# Altium PCB logic_board.PcbDoc
Units mil, origin at the board's own origin, x right, y up, seen from the top; angles counter-clockwise.
Board outline 3937.01 x 3937.01 mil, 2 copper layers (Top Layer, Bottom Layer); 81 components, 66 nets, 283 pads, 36 vias.
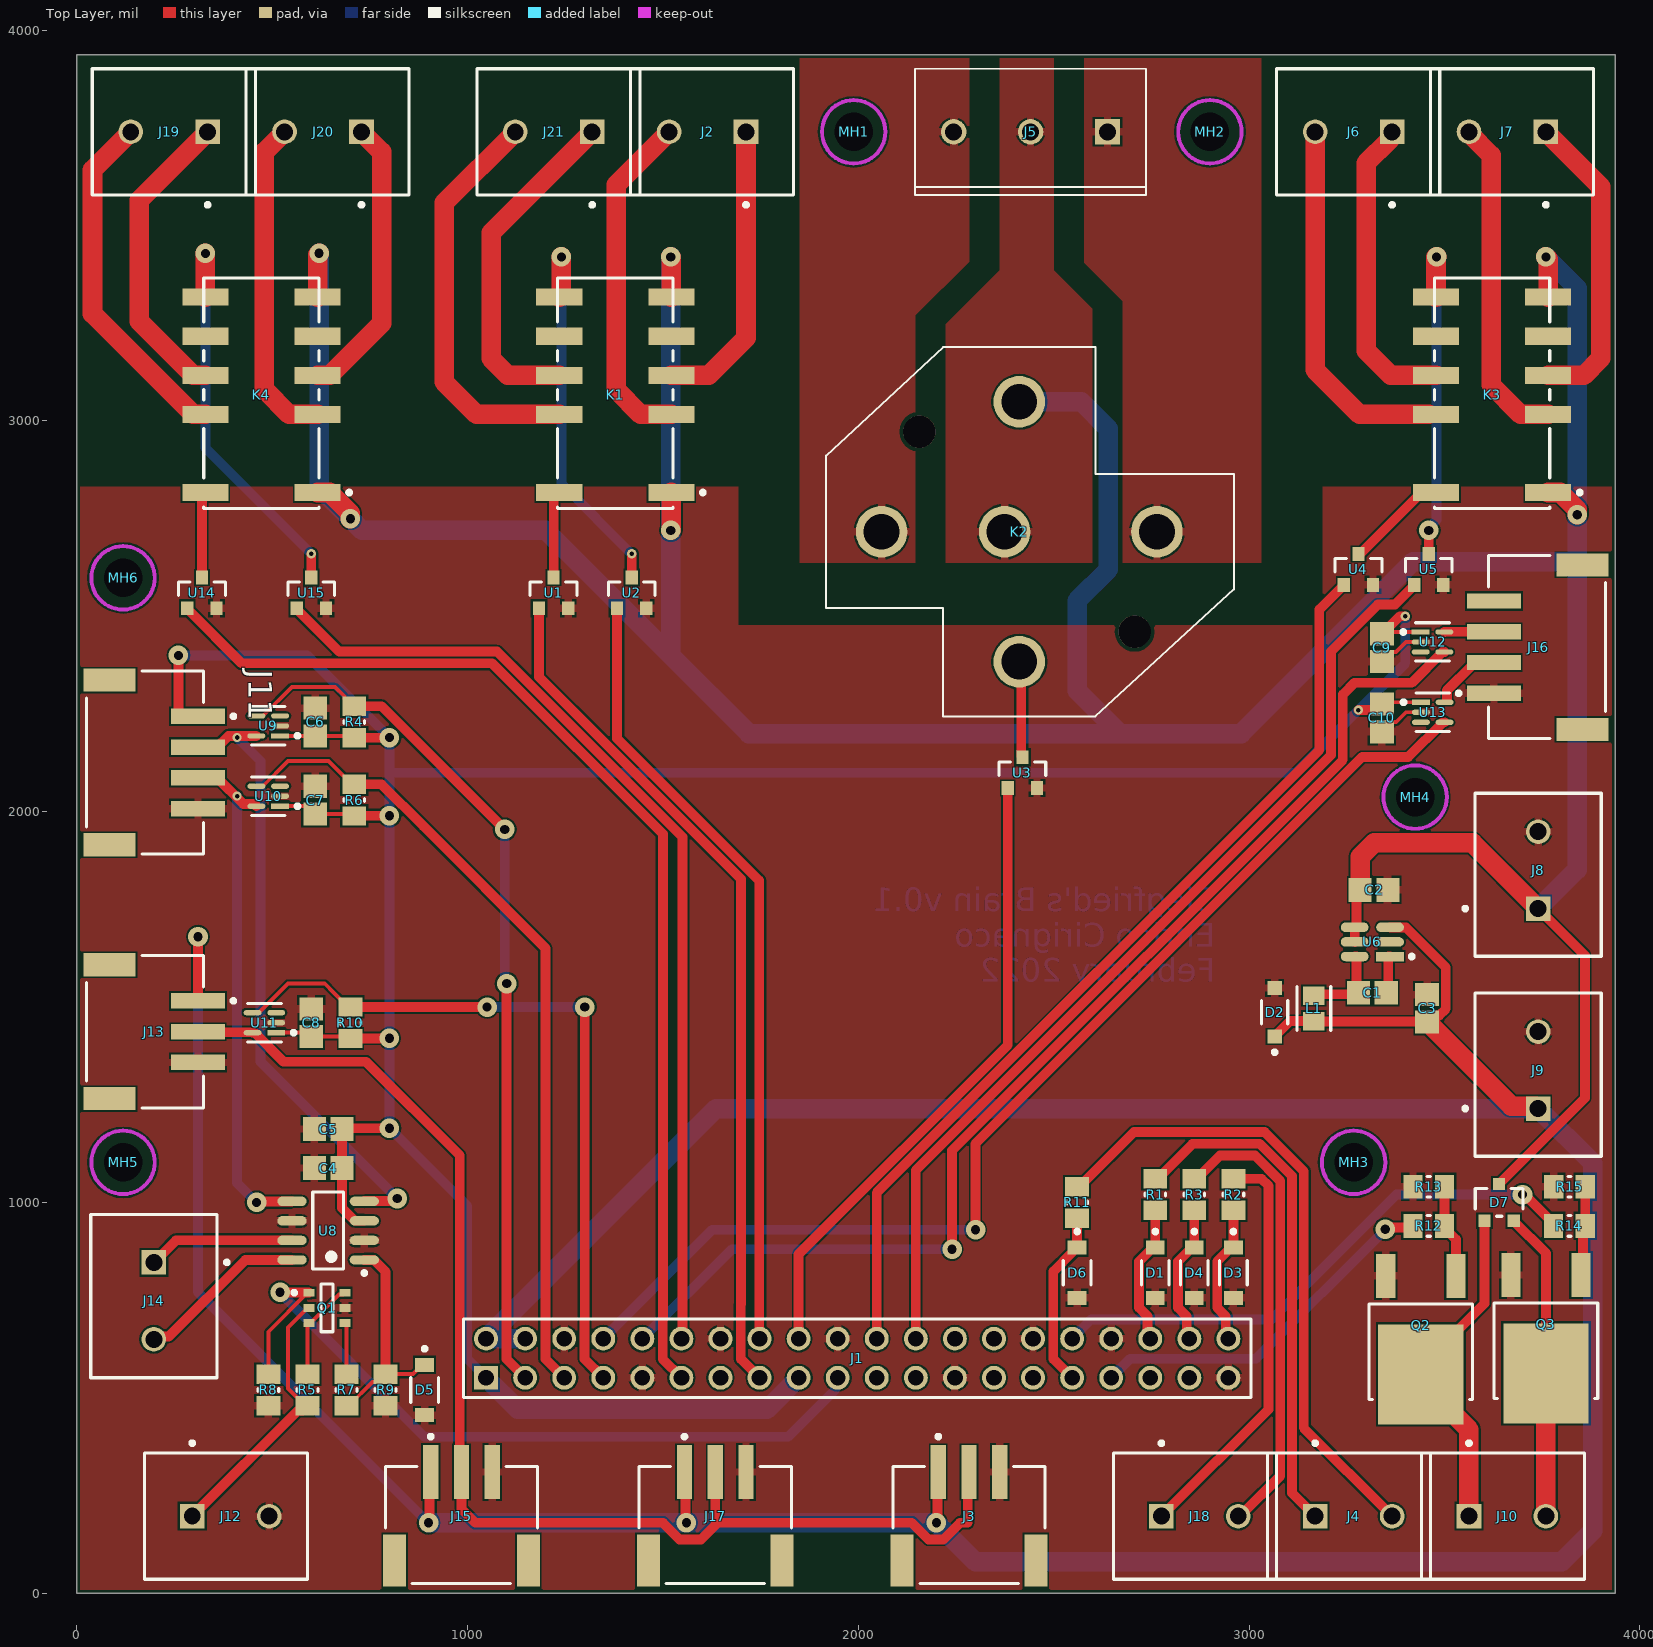
[diagram p0: Top Layer view]
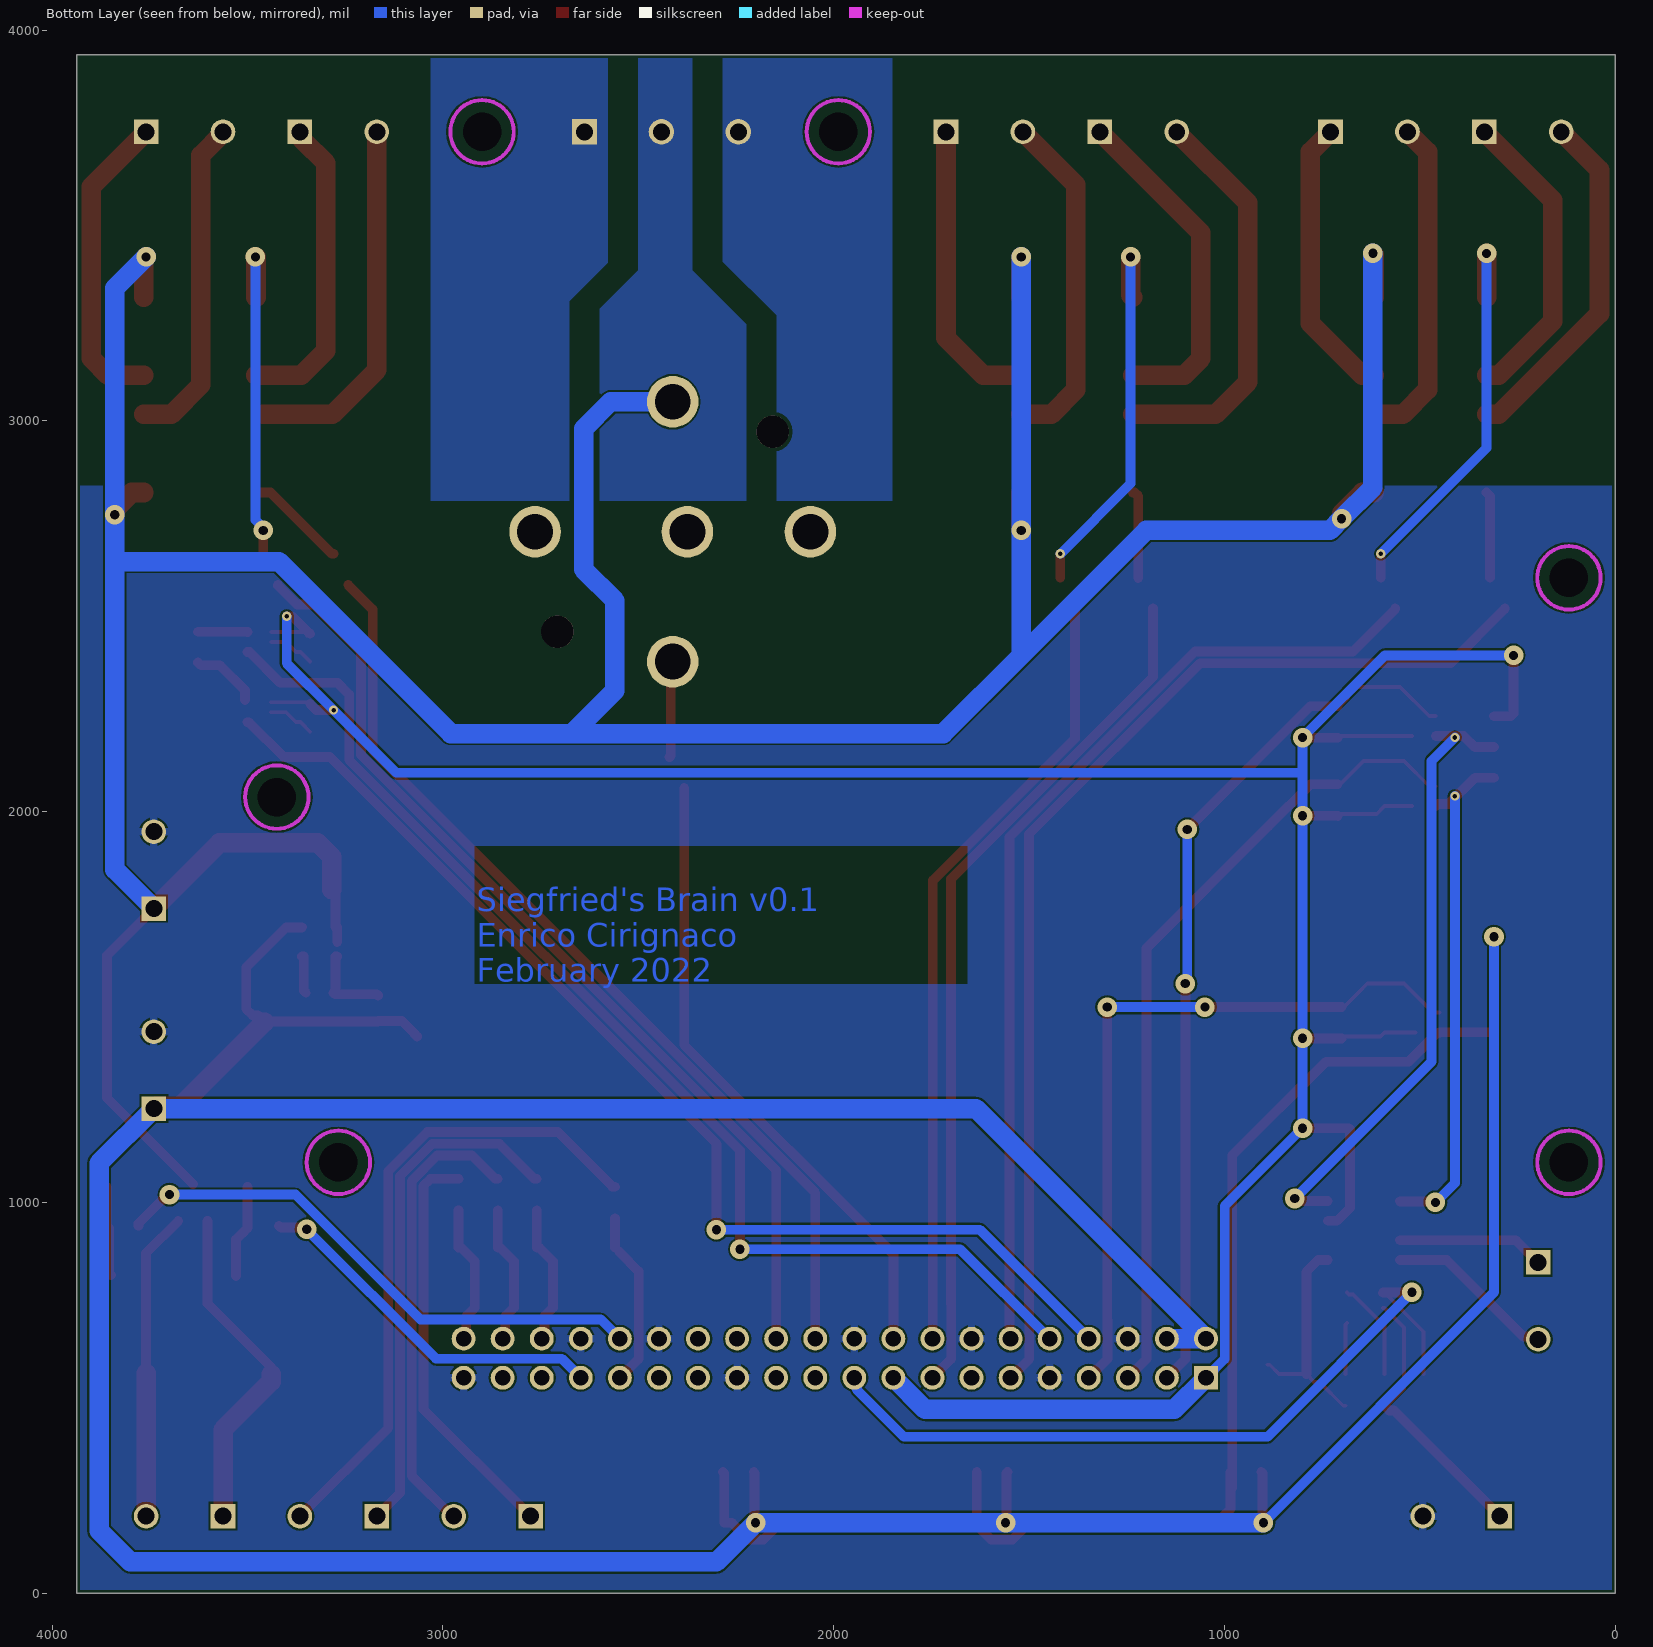
[diagram p1: Bottom Layer view, seen from below]
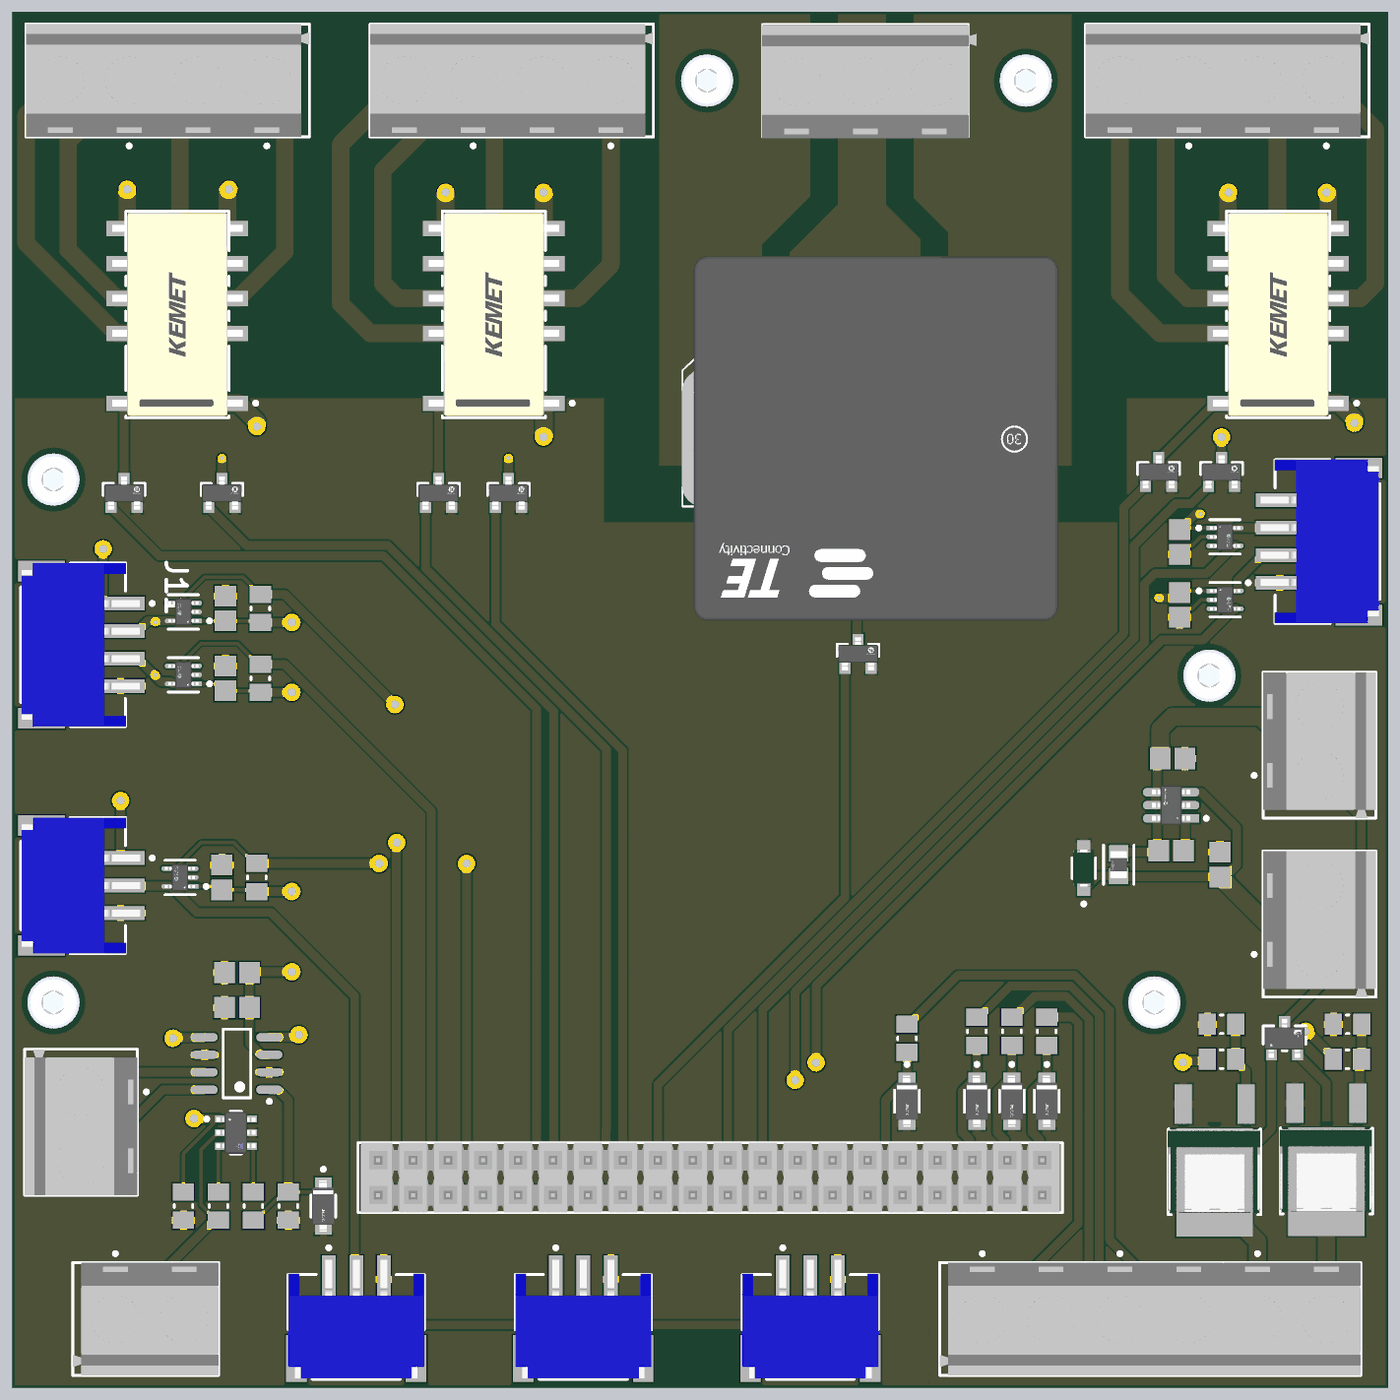
[diagram p2: 3D render of the assembled board from above, using the file's embedded part models]

## Layer stack, top to bottom
Top Solder: solder mask 0.4, Solder Resist, Dk 3.5
Top Layer: signal copper 1.4
Dielectric 1: dielectric 12.6, FR-4, Dk 4.8
Bottom Layer: signal copper 1.4
Bottom Solder: solder mask 0.4, Solder Resist, Dk 3.5

## Board outline
0,0 0,3937.01 3937.01,3937.01 3937.01,0

## Design rules (kind name [scope] priority, off if disabled: settings)
BoardOutlineClearance [All] p1: gap=7.87 ignorepadtopadclearanceinfootprint=FALSE
Clearance high_voltage [All] p1 off: gap=118.11 ignorepadtopadclearanceinfootprint=FALSE
Clearance [All] p2: gap=5 ignorepadtopadclearanceinfootprint=FALSE except(9.84: Arc-Hole Track-Hole SMDPad-Hole THPad-Hole Via-Hole Fill-Hole Poly-Hole Region-Hole Text-Hole)
ComponentClearance [All] p1: gap=5 collisioncheckmode=3 verticalgap=5 showdistances=TRUE
DiffPairsRouting [All] p1: maxlimit=10 minlimit=5 mostfreqgap=5 toplayer_minwidth=5 toplayer_maxwidth=1000 toplayer_prefwidth=5 bottomlayer_minwidth=5 bottomlayer_maxwidth=1000 bottomlayer_prefwidth=5 maxuncoupledlength=500
Height [All] p1: minheight=0 maxheight=71497.94 prefheight=500
HoleSize [All] p1: absolutevalues=TRUE maxlimit=248.03 minlimit=11.81 maxpercent=80.000 minpercent=20.000
HoleToHoleClearance [All] p1: gap=9.84 allowstackedmicrovias=FALSE
MinimumAnnularRing [All] p1: minimumring=3
MinimumSolderMaskSliver [All] p1: minsoldermaskwidth=0
PlaneClearance [All] p1: clearance=5
PlaneConnect PlaneConnectPowerPads [InPadClass('PowerPads')] p1: planeconnectstyle=Direct reliefexpansion=20 reliefentries=4 reliefconductorwidth=10 reliefairgap=10
PlaneConnect [All] p2: pad.planeconnectstyle=Relief pad.reliefexpansion=11.81 pad.reliefentries=4 pad.reliefconductorwidth=5 pad.reliefairgap=5 via.planeconnectstyle=Direct via.reliefexpansion=11.81 via.reliefentries=4 via.reliefconductorwidth=5 via.reliefairgap=5
PolygonConnect PolygonConnect_2 [All vs IsNamedPolygon('NETJ5_1_L02_P006') Or IsNamedPolygon('NETJ5_2_L02_P005') Or IsNamedPolygon('NETJ5_3_L02_P004')] p1: thpad.connectstyle=Direct thpad.reliefconductorwidth=10 thpad.reliefentries=4 thpad.polygonreliefangle="90 Angle" thpad.airgapwidth=10 smdpad.connectstyle=Relief smdpad.reliefconductorwidth=10 smdpad.reliefentries=4 smdpad.polygonreliefangle="90 Angle" smdpad.airgapwidth=10 via.connectstyle=Relief via.reliefconductorwidth=10 via.reliefentries=4 via.polygonreliefangle="90 Angle" via.airgapwidth=10
PolygonConnect PolygonConnect_1 [All vs IsNamedPolygon('NETJ5_1_L02_P006') Or IsNamedPolygon('NETJ5_2_L02_P005') Or IsNamedPolygon('NETJ5_3_L02_P004')] p2: thpad.connectstyle=Direct thpad.reliefconductorwidth=10 thpad.reliefentries=4 thpad.polygonreliefangle="90 Angle" thpad.airgapwidth=10 smdpad.connectstyle=Relief smdpad.reliefconductorwidth=10 smdpad.reliefentries=4 smdpad.polygonreliefangle="90 Angle" smdpad.airgapwidth=10 via.connectstyle=Relief via.reliefconductorwidth=10 via.reliefentries=4 via.polygonreliefangle="90 Angle" via.airgapwidth=10
PolygonConnect PolygonConnectPowerPads [All vs (InPadClass('PowerPads'))] p3: connectstyle=Direct reliefconductorwidth=10 reliefentries=4 polygonreliefangle="90 Angle" airgapwidth=10
PolygonConnect [All] p4: thpad.connectstyle=Relief thpad.reliefconductorwidth=20 thpad.reliefentries=4 thpad.polygonreliefangle="90 Angle" thpad.airgapwidth=5 smdpad.connectstyle=Relief smdpad.reliefconductorwidth=20 smdpad.reliefentries=4 smdpad.polygonreliefangle="90 Angle" smdpad.airgapwidth=5 via.connectstyle=Direct via.reliefconductorwidth=5 via.reliefentries=4 via.polygonreliefangle="90 Angle" via.airgapwidth=5
RoutingVias [All] p1: holewidth=11.81 width=23.62 viastyle="Through Hole" minholewidth=11.81 minwidth=23.62 maxholewidth=23.62 maxwidth=259.84
SilkToSilkClearance [All] p1: silktosilkclearance=0
SilkToSolderMaskClearance [IsPad] p1: minsilkscreentomaskgap=5 clearancetoexposedcopper=TRUE
SolderMaskExpansion [All] p1: expansion=2.95 istentingtop=FALSE
Width [All] p1: maxlimit=50 minlimit=10 preferedwidth=25
20 further rules are at their usual default settings.

## Classes and differential pairs
component class U_charger_module: J19 J20 K4 U14 U15 X5 X6
component class U_fridge_module: J2 J3 J21 K1 U1 U2 X?
component class U_water_system_module: D3 D4 D6 D7 J10 J18 Q2 Q3 R2 R3 R11 R12 R13 R14 R15 X?
component class U_inverter_module: D1 J4 J5 J6 J7 K2 K3 R1 U3 U4 U5 X?
component class U_interfaces_module: C4 C5 C6 C7 C8 C9 C10 D5 J11 J12 J13 J14 J15 J16 J17 Q1 R4 R5 R6 R7 R8 R9 R10 U8 U9 U10 U11 U12 U13 X?
component class U_control_module: C1 C2 C3 D2 J1 J8 J9 L1 L? MH1 MH2 MH3 MH4 MH5 MH6 U6

## Components (designator, comment, footprint, x,y, rotation, side; value= is the part's Value field where it differs from the comment)
C1 "0.1uF 10V" CAPC2013X88X50ML20T25 3315.75,1536.7 r0 top
C2 "2.2uF 50V" CAPC2013X88X50ML20T25 3320,1800 r180 top
C3 "10uF 35V" CAPC2013X88X50ML20T25 3455.75,1496.7 r90 top
C4 "100nF 25V" CAPC2013X88X50ML20T25 643.07,1087.86 r0 top
C5 "10uF 25V" CAPC2013X88X50ML20T25 643.07,1187.86 r0 top
C6 "100nF 25V" CAPC2013X88X50ML20T25 610,2229.65 r270 top
C7 "100nF 25V" CAPC2013X88X50ML20T25 610,2029.65 r270 top
C8 "100nF 25V" CAPC2013X88X50ML20T25 600,1460 r270 top
C9 "100nF 25V" CAPC2013X88X50ML20T25 3340,2420 r90 top
C10 "100nF 25V" CAPC2013X88X50ML20T25 3340,2240 r90 top
D1 "MMSZ4683-TP" FP-SOD-123-MFG 2760,820 r270 top
D2 "MMSZ5231B-7-F" FP-SOD123-MFG 3065.75,1486.7 r90 top
D3 "MMSZ4683-TP" FP-SOD-123-MFG 2960,820 r270 top
D4 "MMSZ4683-TP" FP-SOD-123-MFG 2860,820 r270 top
D5 "MMSZ4683-TP" FP-SOD-123-MFG 890,520 r270 top
D6 "MMSZ4683-TP" FP-SOD-123-MFG 2560,820 r270 top
D7 "BAT54C" SOT-23 3640,1000 r90 top
J1 "Raspberry Pi Zero WH" RASPBERRY_ZERO 1047.24,551.18 r180 top locked
J2 "282836-2" TECO-282836-2_V 1614.17,3740.16 r180 top
J3 "JST-S3B-PH-SM4-TB-3_V" JST-S3B-PH-SM4-TB-3_V 2283.46,196.85 r0 top locked
J4 "282836-2" TECO-282836-2_V 3267.72,196.85 r0 top locked
J5 "282836-3" TE_282836-3 2440.94,3740.16 r180 top
J6 "282836-2" TECO-282836-2_V 3267.72,3740.16 r180 top
J7 "282836-2" TECO-282836-2_V 3661.42,3740.16 r180 top
J8 "282836-2" TECO-282836-2_V 3740.16,1850.39 r90 top
J9 "282836-2" TECO-282836-2_V 3740.16,1338.58 r90 top
J10 "282836-2" TECO-282836-2_V 3661.42,196.85 r0 top locked
J11 "JST-S4B-PH-SM4-TB-3_V" JST-S4B-PH-SM4-TB-3_V 196.85,2125.98 r270 top locked
J12 "282836-2" TECO-282836-2_V 393.7,196.85 r0 top locked
J13 "JST-S3B-PH-SM4-TB-3_V" JST-S3B-PH-SM4-TB-3_V 196.85,1437.01 r270 top locked
J14 "282836-2" TECO-282836-2_V 196.85,748.03 r270 top locked
J15 "JST-S3B-PH-SM4-TB-3_V" JST-S3B-PH-SM4-TB-3_V 984.25,196.85 r0 top locked
J16 "JST-S4B-PH-SM4-TB-3_V" JST-S4B-PH-SM4-TB-3_V 3740.16,2421.26 r90 top locked
J17 "JST-S3B-PH-SM4-TB-3_V" JST-S3B-PH-SM4-TB-3_V 1633.86,196.85 r0 top locked
J18 "282836-2" TECO-282836-2_V 2874.02,196.85 r0 top locked
J19 "282836-2" TECO-282836-2_V 236.22,3740.16 r180 top
J20 "282836-2" TECO-282836-2_V 629.92,3740.16 r180 top
J21 "282836-2" TECO-282836-2_V 1220.47,3740.16 r180 top
K1 "EE2-12TNU-L" FP-EE2-12TNU-L-MFG 1377.95,3070.87 r90 top
K2 "12VDC 30A" automotive_relay 2411.97,2716.54 r0 top
K3 "EE2-12TNU-L" FP-EE2-12TNU-L-MFG 3622.05,3070.87 r90 top
K4 "EE2-12TNU-L" FP-EE2-12TNU-L-MFG 472.44,3070.87 r90 top
L1 "LQM21PN4R7NGRD" FP-LQM21PH_G0-IPC_B 3165.75,1496.7 r270 top
MH1 "MOUNTING_HOLE_M2" MOUNTING_HOLE_M2 1988.19,3740.16 r0 top
MH2 "MOUNTING_HOLE_M2" MOUNTING_HOLE_M2 2900,3740.16 r0 top
MH3 "MOUNTING_HOLE_M2" MOUNTING_HOLE_M2 3267.72,1102.36 r0 top
MH4 "MOUNTING_HOLE_M2" MOUNTING_HOLE_M2 3425.2,2037.4 r0 top
MH5 "MOUNTING_HOLE_M2" MOUNTING_HOLE_M2 118.11,1102.36 r0 top
MH6 "MOUNTING_HOLE_M2" MOUNTING_HOLE_M2 118.11,2598.43 r0 top
Q1 "SI3590DV-T1-E3" FP-C-06593-6-MFG 640,730 r0 top
Q2 "FDD86250" FP-369AS-MFG 3440,617.58 r180 top
Q3 "FDD86250" FP-369AS-MFG 3760,620 r180 top
R1 "200kΩ" RESC2013X50X30ML20T20 2760,1020 r90 top
R2 "200kΩ" RESC2013X50X30ML20T20 2960,1020 r90 top
R3 "200kΩ" RESC2013X50X30ML20T20 2860,1020 r270 top
R4 "4.1kΩ" RESC2013X50X30ML20T20 710,2229.65 r270 top
R5 "100K" RESC2013X50X30ML20T20 590,520 r90 top
R6 "4.1kΩ" RESC2013X50X30ML20T20 710,2029.65 r270 top
R7 "700kΩ" RESC2013X50X30ML20T20 690,520 r270 top
R8 "100K" RESC2013X50X30ML20T20 490,520 r270 top
R9 "100kΩ" RESC2013X50X30ML20T20 790,520 r90 top
R10 "4.1kΩ" RESC2013X50X30ML20T20 700,1460 r270 top
R11 "200kΩ" RESC2013X50X30ML20T20 2560,1000 r90 top
R12 "10kΩ" RESC2013X50X30ML20T20 3460,940 r180 top
R13 "100kΩ" RESC2013X50X30ML20T20 3460,1040 r180 top
R14 "10kΩ" RESC2013X50X30ML20T20 3820,940 r180 top
R15 "100kΩ" RESC2013X50X30ML20T20 3820.35,1040 r180 top
U1 "NUD3160LT1G" FP-318-08-MFG 1220,2560 r90 top
U2 "NUD3160LT1G" FP-318-08-MFG 1420,2560 r90 top
U3 "NUD3160LT1G" FP-318-08-MFG 2420,2100 r90 top
U4 "NUD3160LT1G" FP-318-08-MFG 3280,2620 r90 top
U5 "NUD3160LT1G" FP-318-08-MFG 3460,2620 r90 top
U6 "LMR50410Y3FQDBVRQ1" 3.3v_voltage_regulator 3315.75,1666.7 r180 top
U8 "" SOIC-SN8_L 643.07,927.86 r180 top
U9 "MAX9940AXK+T" FP-X5-1-IPC_C 489.68,2219.65 r180 top
U10 "MAX9940AXK+T" FP-X5-1-IPC_C 489.68,2039.65 r180 top
U11 "MAX9940AXK+T" FP-X5-1-IPC_C 480,1460 r180 top
U12 "MAX9940AXK+T" FP-X5-1-IPC_C 3469.68,2434.41 r0 top
U13 "MAX9940AXK+T" FP-X5-1-IPC_C 3470.32,2254.41 r0 top
U14 "NUD3160LT1G" FP-318-08-MFG 320,2560 r90 top
U15 "NUD3160LT1G" FP-318-08-MFG 600,2560 r90 top

## Footprints (in the part's own frame and the unit in brackets; to place one, negate y for a bottom-side part, rotate by r counter-clockwise, add the part's x,y. Pads: shape width x height; smd on the part's side, far side on the other; paste and mask are expansions set on the pad)
3.3v_voltage_regulator [mm]
  rect 1.805x0.618 smd paste+0 mask+0: 1(-1.15,0.95)
  rrect100% 1.805x0.618 smd paste+0 mask+0: 2(-1.15,0) 3(-1.15,-0.95) 4(1.15,-0.95) 5(1.15,0) 6(1.15,0.95)
  silkscreen extent -2.68,0.83 -2.43,1.07, body extent -1.4,-1.45 1.4,1.45, height 1.45
automotive_relay [mil]
  round 132 hole 92: 30(352.36,0) 85(0,-332.68) 86(0,332.68) 87(-352.36,0) 87A(-37.4,0)
  round 82.68 hole 82.68 unplated: ""(-255.91,255.91) ""(295.28,-255.91)
  silkscreen extent -494,-472 549,472, body extent -496,-522 581,522, height 1555
CAPC2013X88X50ML20T25 [mm] "Chip Capacitor, 2-Leads, Body 2.00x1.25mm, IPC Low Density"
  rect 1.5x1.55 smd: 1(-0.9,0) 2(0.9,0)
  body extent -1.1,-0.72 1.1,0.72, height 0.88
FP-318-08-MFG [mm]
  rect 0.9x0.8 smd paste+0 mask+0: 1(-1,0.95) 2(-1,-0.95) 3(1,0)
  silkscreen extent -0.18,-1.52 0.7,1.52, body extent -1.55,-1.62 1.55,1.62, height 0.25
FP-369AS-MFG [mm]
  rect 1.25x2.85 smd paste+0 mask+0: 1(-2.28,-4.938) 3(2.28,-4.938)
  rect 5.55x6.5 smd paste+0 mask+0: 4(0,1.462)
  silkscreen extent -3.36,-3.11 3.36,3.11, body extent -3.46,-6.46 3.46,4.81, height 0.25
FP-C-06593-6-MFG [mil]
  rect 28x20 smd paste+0 mask+0: 1(-46,39) 2(-46,0) 3(-46,-39) 4(46,-39) 5(46,0) 6(46,39)
  silkscreen extent -89,-61 16,61, body extent -64,-65 64,65, height 10
FP-EE2-12TNU-L-MFG [mm]
  rect 1.11x3 smd paste+0 mask+0: 1(-6.45,-3.645) 3(-1.37,-3.645) 4(1.17,-3.645) 5(3.71,-3.645) 6(6.25,-3.645) 7(6.25,3.645) 8(3.71,3.645) 9(1.17,3.645) 10(-1.37,3.645) 12(-6.45,3.645)
  silkscreen extent -7.5,-5.82 7.5,3.75, body extent -7.6,-5.25 7.6,5.25, height 0.25
FP-LQM21PH_G0-IPC_B [mil]
  rect 47.48x55.44 smd paste+0 mask+0: 1(-32.52,0) 2(32.52,0)
  silkscreen extent -56,-43 56,43, body extent -66,-38 66,38, height 10
FP-SOD123-MFG [mm]
  rect 0.9x0.95 smd paste+0 mask+0: 1(-1.575,0) 2(1.575,0)
  silkscreen extent -2.72,-0.85 0.75,0.85, body extent -2.12,-0.95 2.12,0.95, height 0.25
FP-SOD-123-MFG [mm]
  rect 0.91x1.22 smd paste+0 mask+0: 1(-1.635,0) 2(1.635,0)
  silkscreen extent -2.8,-0.9 0.8,0.9, body extent -2.19,-1 2.19,1, height 0.25
FP-X5-1-IPC_C [mm]
  rect 1.164x0.336 smd paste+0 mask+0: 1(-0.77,0.65)
  rrect100% 1.164x0.336 smd paste+0 mask+0: 2(-0.77,0) 3(-0.77,-0.65) 4(0.77,-0.65) 5(0.77,0.65)
  silkscreen extent -2.03,-1.25 1.1,1.25, body extent -1.45,-1.1 1.45,1.1, height 0.25
JST-S3B-PH-SM4-TB-3_V [mm] "Header, 3-Leads, Body 9.9x7.6mm, Pitch 2mm"
  rect 1x3.5 smd: 1(-2,2.875) 2(0,2.875) 3(2,2.875)
  rect 1.5x3.4 smd: MP1(-4.35,-2.875) MP2(4.35,-2.875)
  silkscreen extent -4.95,-4.37 4.95,5.3, body extent -4.95,-4.3 4.95,4.3, height 5.5
JST-S4B-PH-SM4-TB-3_V [mm] "Header, 3-Leads, Body 9.9x7.6mm, Pitch 2mm"
  rect 1x3.5 smd: 1(-3,2.875) 2(-1,2.875) 3(1,2.875) 4(3,2.875)
  rect 1.5x3.4 smd: MP1(-5.35,-2.875) MP2(5.35,-2.875)
  silkscreen extent -5.95,-4.37 5.95,5.3, body extent -5.93,-4.32 5.97,4.28, height 5.5
MOUNTING_HOLE_M2 [mm]
  round 0 hole 2.5: 15(0,0)
  Top Layer keep-out circle w0.254: c0,0 r2.062
  Bottom Layer keep-out circle w0.254: c0,0 r2.062
  body extent -1.9,-1.9 1.9,1.9, height 2
RASPBERRY_ZERO [mm]
  rect 1.55x1.55 hole 1.02: 1(0,0)
  round 1.55 hole 1.02: 2(0,-2.54) 3(-2.54,0) 4(-2.54,-2.54) 5(-5.08,0) 6(-5.08,-2.54) 7(-7.62,0) 8(-7.62,-2.54) 9(-10.16,0) 10(-10.16,-2.54) 11(-12.7,0) 12(-12.7,-2.54) 13(-15.24,0) 14(-15.24,-2.54) 15(-17.78,0) 16(-17.78,-2.54) 17(-20.32,0) 18(-20.32,-2.54) 19(-22.86,0) 20(-22.86,-2.54) 21(-25.4,0) 22(-25.4,-2.54) 23(-27.94,0) 24(-27.94,-2.54) 25(-30.48,0) 26(-30.48,-2.54) 27(-33.02,0) 28(-33.02,-2.54) 29(-35.56,0) 30(-35.56,-2.54) 31(-38.1,0) 32(-38.1,-2.54) 33(-40.64,0) 34(-40.64,-2.54) 35(-43.18,0) 36(-43.18,-2.54) 37(-45.72,0) 38(-45.72,-2.54) 39(-48.26,0) 40(-48.26,-2.54)
  silkscreen extent -49.72,-3.81 1.46,1.27, body extent -56.63,-29.2 9.27,2.05, height 13.3
RESC2013X50X30ML20T20 [mm] "Chip Resistor, 2-Leads, Body 2.00x1.25mm, IPC Low Density"
  rect 1.25x1.55 smd: 1(-1.025,0) 2(1.025,0)
  silkscreen extent -0.1,-0.67 0.1,0.67, body extent -1.1,-0.72 1.1,0.72, height 0.5
SOIC-SN8_L [mm] "SOIC, 8-Leads, Body 4.9x3.9mm, Pitch 1.27mm, IPC High Density"
  oval 1.9x0.6 smd: 1(-2.35,1.905) 2(-2.35,0.635) 3(-2.35,-0.635) 4(-2.35,-1.905) 5(2.35,-1.905) 6(2.35,-0.635) 7(2.35,0.635) 8(2.35,1.905)
  silkscreen extent -2.48,-2.5 1,2.88, body extent -2,-2.5 2,2.5, height 1.75
SOT-23 [mm]
  rect 0.8x0.8 smd paste+0 mask+0: 1(-1.2,0.95) 2(-1.2,-0.95) 3(1.2,0)
  silkscreen extent -0.9,-1.55 0.9,1.55, body extent -1.7,-1.78 1.7,1.78, height 0.25
TE_282836-3 [mm]
  rect 1.65x1.65 hole 1.1: 1(-5,0)
  round 1.65 hole 1.1: 2(0,0) 3(5,0)
  silkscreen extent -7.5,-4.1 7.5,4.1, body extent -8.1,-4 7.5,4.2, height 10
TECO-282836-2_V [mm] "Female Header, Pitch 5mm, 1 x 2 Position, Height 10mm"
  rect 1.6x1.6 hole 1.1: 1(-2.5,0)
  round 1.6 hole 1.1: 2(2.5,0)
  silkscreen extent -5.6,-4.1 5,4.87, body extent -5.6,-4.1 5,4.1, height 10

## Part data
C1 C2 C3 C4 C5 C6 C7 C8 C9 C10: library part Cap_0805, "Capacitor"
D1 D3 D4 D5 D6: library part CMP-56208-000004-1, "DIODE ZENER 3V 500MW SOD123", Forward Voltage=950mV, Max Operating Temperature=150°C, Max Power Dissipation=500mW, Max Reverse Leakage Current=800nA, Min Operating Temperature=-55°C, Package Quantity=1, Tolerance=5%, Working Voltage=3V, Element Configuration=Single, Lead Free="Lead Free", Mount="Surface Mount", Number of Pins=2, Packaging="Tape and Reel", Peak Reverse Current=800nA, Power Dissipation=500mW, Radiation Hardening=No, Voltage Tolerance=5%, Zener Voltage=3V
D2: library part CMP-12792-000005-1, "DIODE ZENER 5.1V 500MW SOD123", Manufacturer=Diodes, Max Junction Temp=+150°C, Max Reverse Leakage Current=5uA, Max Zener Voltage=5.36V, Nom Zener Voltage=5.1V, Package=SOD123, Power Dissipation=370mW, Temperature="-65°C to +150°C", Temperature Range Low=-65°C, Automotive=No, Category=Diode, ComponentLink2Description=Datasheet, ComponentLink2URL=https://www.diodes.com/assets/Datasheets/ds18010.pdf, Device Class L1="Discrete Semiconductors", Device Class L2=Diodes, Device Class L3="Zener Diodes", Digikey Description="DIODE ZENER 5.1V 500MW SOD123", Footprint Url=https://www.diodes.com/assets/Package-Files/SOD123.pdf, Height=1.45mm, Lead Free=Yes, Manufacturer Part Number=MMSZ5231B-7-F, Mouser Description="Zener Diodes 5.1V 500mW", Octopart=https://octopart.com/mmsz5231b-7-f-diodes+inc.-55400050, RoHS=TRUE, Standoff Height=0mm, Temperature Range High=+150°C, Zener Impedance=17Ω
D7: library part DIODE_BAT54C, "Schottky Barrier Diode, 30 V, 3-Pin SOT23, RoHS, Tape and Reel", Current Ifsm=600mA, Diode Case Style=SOT-23, Forward Current If(AV)=200mA, Forward Voltage=800mV, Junction Temperature Tj Max=125degC, Manufacturer="NXP Semiconductors", Operating Temperature Max=150degC, Operating Temperature Min=-65degC, Operating Temperature Range=-65degCto+150degC, Package Description="3-Pin Small Outline Transistor, Body 1.3 x 2.9 mm, Pitch 0.95 mm", Package Reference=SOT23-3, Package Version=Feb-16, Repetitive Reverse Voltage Vrrm Max=30V, Common Connection=Cathode, Datasheet URL=https://datasheet.ciiva.com/33723/1668625-33723936.pdf, Datasheet Version="Rev. 5 , 10/2012", Diode Type=Schottky, Forward Surge Current Ifsm Max=600mA, Forward Voltage VF Max=800mV, Manufacturer URL=http://www.nxp.com/, No. of Pins=3, Package / Case=SOT-23, Package URL=http://www.nxp.com/documents/outline_drawing/SOT23.pdf, Pin Configuration=1A1,2A2,3comK, Reel Quantity=3000, Reverse Recovery Time trr Max=5ns, Reverse Recovery Time trr Typ=5ns, SMD Marking=L43/*W1, SVHC=NoSVHC(19-Dec-2012), Tape Width=8mm, Termination Type=SMD
J1: library part RASPBERRY_PI_ZERO_WH, "Raspberry Pi Zero WH with Headers", Package=None, Availability=Unavailable, MF="Raspberry Pi", MP=ADA3708, Price=None, SnapEDA_Link=https://www.snapeda.com/parts/ADA3708/Raspberry%20Pi/view-part/2770118/?ref=snap
J2 J4 J6 J7 J8 J9 J10 J12 J14 J18 J19 J20 J21: library part CMP-1684-00017-1, "Female Header, Pitch 5 mm, 1 x 2 Position, Height 10 mm, Tail Length 3.5 mm, Rohs, Bulk", Color=Green, Current=13.5A, Manufacturer="TE Connectivity", Package Description="Female Header, Pitch 5 mm, 1 x 2 Position, Height 10 mm, Tail Length 3.5 mm", Package Reference=THD, Standard Package=300, Voltage=300V, 3D Model=282836-2.pdf, Category=Connectors,Interconnects, Clamp Material - Plating=Brass-NickelPlated, Contact Material - Plating=Brass-TinPlated, Datasheet URL=http://www.te.com.cn/commerce/DocumentDelivery/DDEController?Action=showdoc&DocId=Catalog+Section%7F1308389_EUROSTYLE_TERMINAL_BLOCKS%7F0607%7Fpdf%7FEnglish%7FENG_CS_1308389_EUROSTYLE_TERMINAL_BLOCKS_0607.pdf%7F282836-2, Dynamic Catalog=BuchananSeries, Family=TerminalBlocks-WiretoBoard, Featured Product=EurostyleTerminalBlockConnectors, Features=Interlocking(Side), Housing Material=Polyamide(PA66),Nylon6/6, Manufacturer URL=http://www.te.com, Mating Orientation=HorizontalwithBoard, Mounting Type=ThroughHole, Number of Levels=1, Other Names="5ULV-02B / A98076", Packaging=Bulk, Pitch="0.197\"(5.00mm)", Positions Per Level=2, Product Training Modules=Wire-to-BoardEurostyleTerminalBlocks, RoHS Information=282836-2StatementofCompliance, Screw Material - Plating=Brass-NickelPlated, Screw Thread=M3, Series=Buchanan, Torque - Screw=0.68Nm(6Lb-In), Wire Gauge=16-30AWG, Wire Termination=Screw-RisingCageClamp
J3 J13 J15 J17: library part CONNECTOR_JST-S3B-PH-SM4
J5: "Connector, Terminal Block; Wire Receptacle; 3 Pos.; 16-30 AWG; 0.197 in. CL; Sid", Color=Green, Current=13.5A, Flammability Rating="UL94 V-0", Manufacturer="TE Connectivity", Max Supply Voltage (AC)=300V, Package Quantity=200, Supplier Part Number 1=571-2828363, Voltage Rating (AC)=250V, Approvals=UL, Category="Terminal Blocks", Closed End="No (Without)", ComponentLink1Description=https://datasheet.ciiva.com/15169/getdatasheetpartid-155856-15169554.pdf?src-supplier=Verical, ComponentLink1URL=https://datasheet.ciiva.com/15169/getdatasheetpartid-155856-15169554.pdf?src-supplier=Verical, ComponentLink2Description=https://datasheet.ciiva.com/16305/eng-cs-1308389-eurostyle-terminal-blocks-0607-16305242.pdf?src-supplier=Future+Electronics, ComponentLink2URL=https://datasheet.ciiva.com/16305/eng-cs-1308389-eurostyle-terminal-blocks-0607-16305242.pdf?src-supplier=Future+Electronics, ComponentLink3Description=https://datasheet.ciiva.com/19460/750661-19460522.pdf?src-supplier=Jameco, ComponentLink3URL=https://datasheet.ciiva.com/19460/750661-19460522.pdf?src-supplier=Jameco, ComponentLink4Description=https://datasheet.ciiva.com/11757/0900766b8002dc8a-11757406.pdf?src-supplier=RSComponents, ComponentLink4URL=https://datasheet.ciiva.com/11757/0900766b8002dc8a-11757406.pdf?src-supplier=RSComponents, ComponentLink5Description=https://datasheet.ciiva.com/823/eng-cd-282836-h10-823445.pdf?src-supplier=Digi-Key, ComponentLink5URL=https://datasheet.ciiva.com/823/eng-cd-282836-h10-823445.pdf?src-supplier=Digi-Key, ComponentLink6Description=https://datasheet.ciiva.com/30106/eng-cs-1308389-eurostyle-terminal-blocks-0607-30106198.pdf?src-supplier=Onlinecomponents.com, ComponentLink6URL=https://datasheet.ciiva.com/30106/eng-cs-1308389-eurostyle-terminal-blocks-0607-30106198.pdf?src-supplier=Onlinecomponents.com, ComponentLink7Description=https://datasheet.ciiva.com/14606/70086276-14606907.pdf?src-supplier=Allied+Electronics, ComponentLink7URL=https://datasheet.ciiva.com/14606/70086276-14606907.pdf?src-supplier=Allied+Electronics, ComponentLink8Description=https://datasheet.ciiva.com/16649/eng-cs-1308389-eurostyle-terminal-blocks-0607-16649389.pdf?src-supplier=Avnet+Europe, ComponentLink8URL=https://datasheet.ciiva.com/16649/eng-cs-1308389-eurostyle-terminal-blocks-0607-16649389.pdf?src-supplier=Avnet+Europe, ComponentLink9Description=https://datasheet.ciiva.com/3141/eng-cs-1308389-eurostyle-terminal-blocks-0607-3141119.pdf?src-supplier=Avnet, ComponentLink9URL=https://datasheet.ciiva.com/3141/eng-cs-1308389-eurostyle-terminal-blocks-0607-3141119.pdf?src-supplier=Avnet, Connector Type=Receptacle, Contact Material=Brass, Contact Plating=Tin, Current Rating=13.5A, Depth=8.2mm, ELV=Compliant, Housing Color=Green, Housing Material=Polyamide, Insulation Material=Nylon, Interlock="Yes (With)", Lead Free="Lead Free", Length=15mm, Manufacturer Part Number=282836-3, Max Current Rating=13.5A, Max Voltage Rating (AC)=300V, Mount="Through Hole,Board", Number of Circuits=3, Number of Contacts=3, Number of Levels=1, Number of Poles=3, Number of Positions=3, Number of Positions Per Level=3, Number of Rows=1, Orientation=Straight, Packaging=Bulk, Pitch=5mm, Plating=Brass, Pricing 1="1=0.96000, 10=0.57500, 50=0.57500, 100=0.48300, 600=0.45700, 1000=0.40600, 2600=0.36800, 4800=0.33000, 10000=0.33000, 11200=0.31700, 25600=0.31100 (USD)", Radiation Hardening=No, REACH SVHC=Unknown, RMS Current (Irms)=13.5A, RoHS=Yes, RoHS Compliant=Yes, Screw Flange="No (Without)", Screwless Terminal Block="No (Without)", Series=Buchanan, Side Stackable="Yes (With)", Stock 1=394, Supplier 1=Mouser, Tail Length=3.5mm, Termination=Screw, Thread Size=M3, Voltage=300V, Voltage Rating=300V, Width=10mm, Wire Gauge (Max)=30AWG, Wire Gauge (Min)=16AWG, Wire/Cable Gauge=16AWG, Working Voltage=250V
J11 J16: library part CONNECTOR_JST-S4B-PH-SM4
K1 K3 K4: library part CMP-03195-000019-1, "RELAY GEN PURPOSE DPDT 2A 12VDC", Coil Current=11.7mA, Coil Power=140mW, Coil Resistance=1.028kR, Coil Voltage (DC)=12V, Contact Current Rating=2A, Max Operating Temperature=85°C, Max Voltage Rating (AC)=250V, Max Voltage Rating (DC)=220V, Min Operating Temperature=-40°C, Package Quantity=500, Coil Type="Latching, Dual Coil", Contact Material=Gold, Current Rating=2A, Depth=7.5mm, Height=9mm, Length=15mm, Max Current Rating=2A, Mount="Surface Mount", Number of Pins=10, Number of Poles=1, Operate Time=2ms, Packaging="Tape and Reel", Power Consumption=140mW, Radiation Hardening=No, REACH SVHC="No SVHC", Relay Type="General Purpose", Release Time=1ms, RoHS Compliant=Yes, Termination="Gull Wing", Throw Configuration=DPDT
K2: library part "Relay automotive", "Power Relay 12VDC 90(NO)/30(NC)A SPDT(26.5x26.5x24.5)mm Plug-In", Coil Current=151mA, Coil Power=1.8W, Coil Resistance=79.5R, Coil Voltage (DC)=12V, Contact Current Rating=30A, Current Rating=40A, Manufacturer="TE Connectivity", Manufacturer Part Number=1432787-1, Max Operating Temperature=85°C, Min Operating Temperature=-40°C, Package Quantity=100, Supplier Part Number 1=7826947, Voltage Rating (DC)=14V, Category="Power Relays", Coil Type=Non-Latching, ComponentLink1Description=https://datasheet.ciiva.com/30468/0900766b8122a645-30468979.pdf?src-supplier=RSComponents, ComponentLink1URL=https://datasheet.ciiva.com/30468/0900766b8122a645-30468979.pdf?src-supplier=RSComponents, ComponentLink2Description=https://datasheet.ciiva.com/30061/eng-cd-1432787-1-b-30061776.pdf?src-supplier=Onlinecomponents.com, ComponentLink2URL=https://datasheet.ciiva.com/30061/eng-cd-1432787-1-b-30061776.pdf?src-supplier=Onlinecomponents.com, Contact Material=Tin,Silver, Lead Free="Lead Free", Mount=Socketable,Plug-In,Socket, Number of Pins=5, Operate Time=10ms, Packaging=Bulk, Pricing 1="1=5.77600, 10=5.49900, 25=5.22200, 50=4.76500, 150=4.16900 (USD)", Relay Type=Automotive, Release Time=13ms, RoHS=Yes, Stock 1=124, Supplier 1=RSComponents, Termination=Plug, Throw Configuration=SPDT,DPDT
L1: library part CMP-06042-016903-1, "Multilayer Type Inductor for Power Lines, 0805 (2012), 4.7μH, 30%, 0.288Ω, 0.8A", Case Code (Imperial)=0805, Case Code (Metric)=2012, Current Rating=800mA, DC Resistance (DCR)=288mR, Inductance=4.7uH, Max Operating Temperature=125°C, Min Operating Temperature=-55°C, Package Quantity=4000, Self Resonant Frequency=30MHz, Test Frequency=1MHz, Tolerance=30%, Case/Package=0805, Core Material=Ferrite, DC Current=800mA, Depth=1.4mm, Height=0.9mm, Height - Seated (Max)=0.039inch, Lead Free="Lead Free", Length=0.079inch, Max DC Current=800mA, Military Standard=Not, Mount="Surface Mount", Packaging="Tape and Reel", Radiation Hardening=No, RoHS Compliant=Yes, Series=LQM21PN_GR, Shielding=Shielded, Termination=SMD/SMT, Width=1.25mm
Q1: library part CMP-02550-000225-1, "MOSFET N/P-CH 30V 2.5A 6TSOP", Continuous Drain Current=2.5/-1.7A, Drain To Source Resistance=0.062/0.135Ω, Drain To Source Voltage=30/-30V, Gate To Source Voltage=12V, Manufacturer=Vishay, Max Forward Diode Voltage=1.1/-1.1V, Max Junction Temp=+150°C, Package=C-06593-6, Power Dissipation=0.83W, Pulse Drain Current=8/-8A, Temperature="-55°C to +150°C", Temperature Range Low=-55°C, Typ Forward Diode Voltage=0.8/-0.83V, Automotive=No, Category=Trans, ComponentLink2Description=Datasheet, ComponentLink2URL=https://www.vishay.com/docs/72032/72032.pdf, Depletion Mode=False, Device Class L1="Discrete Semiconductors", Device Class L2=Transistors, Device Class L3=MOSFETs, Digikey Description="MOSFET N/P-CH 30V 2.5A 6TSOP", Height=1.1mm, Lead Free=Yes, Manufacturer Part Number=SI3590DV-T1-E3, Mouser Description="MOSFET N&P-CH 30V (D-S)", Number Of Channels=2, Number Of N Channels=1, Number Of P Channels=1, Octopart=https://octopart.com/si3590dv-t1-e3-vishay-39731291, Reverse Recovery Time=15/18ns, RoHS=TRUE, Rthja Max=130°C/W, Standoff Height=0.01mm, Temperature Range High=+150°C, Threshold Vgs Max=1.5/-1.5V, Threshold Vgs Min=0.6/-0.6V, Transconductance=10/5S, Turn Off Delay Time=13/20ns, Turn On Delay Time=5/5ns
Q2 Q3: library part CMP-07173-000037-1, "MOSFET N-CH 150V 8A DPAK", Continuous Drain Current=8A, Drain To Source Breakdown Voltage=150V, Drain To Source Resistance=18.4mΩ, Gate To Source Voltage=20V, Input Capacitace At Vds="1585pF @ 75V", Manufacturer="ON Semiconductor", Max Forward Diode Voltage=1.3V, Max Junction Temp=+150°C, Package=369AS, Power Dissipation=3.1W, Pulse Drain Current=164A, Temperature="-55°C to +150°C", Temperature Range Low=-55°C, Typ Forward Diode Voltage=0.78V, Automotive=No, Category=Trans, ComponentLink2Description=Datasheet, ComponentLink2URL=https://www.onsemi.com/pub/Collateral/FDD86250-D.pdf, Depletion Mode=False, Device Class L1="Discrete Semiconductors", Device Class L2=Transistors, Device Class L3=MOSFETs, Digikey Description="MOSFET N-CH 150V 8A DPAK", Drain To Source Voltage=150V, Footprint Url=https://www.onsemi.com/pub/Collateral/369AS.PDF, Gate Charge At Vgs="23nC @ 10V", Height=2.517mm, Lead Free=Yes, Manufacturer Part Number=FDD86250, Mouser Description="Shielded Gate PowerTrench® MOSFET, N-Channel, 150 V, 51 A, 22 mO", Number Of Channels=1, Number Of N Channels=1, Octopart=https://octopart.com/fdd86250-on+semiconductor-84325855, Reverse Recovery Charge=104nC, Reverse Recovery Time=71ns, RoHS=TRUE, Rthja Max=40°C/W, Temperature Range High=+150°C, Threshold Vgs Max=4V, Threshold Vgs Min=2V, Transconductance=28S, Turn Off Delay Time=20ns, Turn On Delay Time=11.2ns
R1 R2 R3 R4 R5 R6 R7 R8 R9 R10 R11 R12 R13 R14 R15: library part Res_0805, "Resistor"
U1 U2 U3 U4 U5 U14 U15: library part CMP-07123-000002-1, "IC INDCT LOAD DRVR INDUST SOT23", Ambient Temperature Range High=+125°C, Ambient Temperature Range Low=-40°C, Manufacturer="ON Semiconductor", Max Junction Temp=+150°C, Max Power Dissipation=225mW, Max Supply Voltage=60V, Output Current=150mA, Output Voltage=48V, Package=318-08, Temperature="-40°C to +150°C", Automotive=No, Category=IC, ComponentLink2Description=Datasheet, ComponentLink2URL=https://www.onsemi.com/pub/Collateral/NUD3160-D.PDF, Device Class L1="Integrated Circuits (ICs)", Device Class L2="Power Management ICs", Device Class L3="Gate Drivers", Digikey Description="IC INDCT LOAD DRVR INDUST SOT23", Fall Time=622ns, Footprint Url=https://www.onsemi.com/pub/Collateral/318-08.PDF, Height=1.11mm, Lead Free=Yes, Manufacturer Part Number=NUD3160LT1G, Mouser Description="MOSFET 61V Industrial Load Driver", Number Of Drivers=1, Number Of Outputs=1, Octopart=https://octopart.com/nud3160lt1g-on+semiconductor-470723, Propagation Delay=1160ns, Rise Time=600ns, RoHS=TRUE, Standoff Height=0.01mm, Temperature Range High=+150°C, Temperature Range Low=-40°C
U6: "3,3V voltage regulator", Manufacturer="Texas Instruments", Supplier Part Number 1=296-LMR50410Y3FQDBVRQ1CT-ND, Manufacturer Part Number=LMR50410Y3FQDBVRQ1, Pricing 1="1=1.65000, 10=1.47600, 25=1.40080, 100=1.07570, 250=0.95060, 500=0.90058, 1000=0.70045 (USD)", RoHS=Yes, Stock 1=2682, Supplier 1=Digi-Key
U8: library part CMP-0188-01151-1, "16-Bit, Multi-Channel Delta-Sigma Analog-to-Digital Converter with I2C Interface and On-Board Reference, 8-Pin SOIC 150mil, Extended Temperature", Code_IPC=SOIC127P600-8, Code_JEDEC=MS-012, ComponentLink1Description="Manufacturer URL", ComponentLink1URL=http://www.microchip.com/, ComponentLink2Description=Datasheet, ComponentLink2URL=http://ww1.microchip.com/downloads/en/DeviceDoc/22226a.pdf, ComponentLink3Description="Package Specification", ComponentLink3URL=http://www.microchip.com/stellent/groups/techpub_sg/documents/packagingspec/en012702.pdf, DatasheetVersion="revA, Dec-2009", PackageDescription="8-Lead Plastic Small Outline (SN) - Narrow, 3.90mm Body [SOIC]", PackageReference=SOIC-SN8, PackageVersion="revBB, Aug-2009"
U9 U10 U11 U12 U13: library part CMP-05714-000005-2, "IC OVERVOLTAGE PROTECTOR SC70-5", Clamping Voltage=28V, Max Operating Temperature=125°C, Max Power Dissipation=245mW, Max Supply Voltage=5.5V, Min Operating Temperature=-40°C, Min Supply Voltage=2.2V, Nominal Supply Current=13uA, Package Quantity=2500, Number of Circuits=1, Number of Pins=5, Packaging="Tape and Reel", Radiation Hardening=No, Working Voltage=5.5V

## Via types
v1: diameter 50, hole 23.62, Top Layer to Bottom Layer, 30 vias
v2: diameter 23.62, hole 11.81, Top Layer to Bottom Layer, 6 vias

## Nets (pads, with @x,y where several pads share a name; then routed paths per layer and width w, separated by ;. In a path a pad name is that pad's centre, name@x,y a point inside that pad or via, vN(x,y) a via of type N, cw(c..) or ccw(c..) an arc to the next point about the centre after c; other vN are vias at no path point)
+3V3: C4.2 C5.2 C6.2 C7.2 C8.2 C9.2 C10.2 J1.1 J1.17 J11.1 R4.2 R6.2 R10.2 U8.3 U9.1 U10.1 U11.1 U12.1 U13.1 | length 7877.4
  Top Layer w10: U11.1 590.16,1434.41 C8.2 695.08,1424.57 R10.2 ; U10.1 590.16,2014.06 C7.2 705.08,1994.21 R6.2 ; U9.1 609.84,2194.06 C6.2 705.08,2194.21 R4.2 ; C10.2 3344.57,2280 U13.1 ; C9.2@3345.55,2460 U12.1
  Top Layer w25: v1(260,2400) 260,2251.28 267.19,2244.09 J11.1 ; R10.2 700.18,1419.82 799.82,1419.82 v1(800,1420) ; R6.2 710.18,1989.47 799.82,1989.47 v1(800,1989.65) ; R4.2 710.18,2189.47 799.82,2189.47 v1(800,2189.65) ; U8.3 711.38,952.86 678.5,985.73 C4.2 C5.2 680.64,1190 v1(800,1190) ; v2(3280,2260) 3324.57,2260 C10.2 ; C9.2 3340.98,2455.43 3345.55,2460 3385.55,2500 v2(3400,2500)
  Bottom Layer w25: v1(260,2400) 589.65,2400 v1(800,2189.65) 800,2099.82 ; J1.1 999.23,599.19 999.23,990.77 v1(800,1190) v1(800,1420) v1(800,1989.65) 800,2010 800,2099.82 ; v2(3400,2500) 3400,2380 v2(3280,2260) 3119.82,2099.82 800,2099.82
  Bottom Layer w50: J1.1 1128.42,470 1766.06,470 J1.17
+5V: C3.1 D2.1 J1.2 J1.4 J3.1 J9.1 J13.1 J15.1 J17.1 L1.2 U6.3 | length 10672.2
  Top Layer w25: v1(310,1680) 310,1515.79 J13.1 ; v1(900,180) 902.76,182.76 902.76,307.28 J15.1 ; J17.1 1557.56,307.6 1557.56,182.54 v1(1560.05,180.05) ; v1(2200,180) 2202.36,182.36 2202.36,307.68 J3.1 ; D2.1 3066.74,1424.69 3071.96,1429.91 3071.96,1430.89 3105.24,1464.17 L1.2 3167.21,1462.72 3454.3,1462.72 C3.1 3472.78,1478.29 3486.7,1478.29 3503.77,1495.35 3503.77,1601.45 3401.46,1703.76 3361.38,1703.76 U6.3
  Top Layer w50: C3.1 3456.74,1461.26 3671.35,1246.65 3733.66,1246.65 J9.1
  Bottom Layer w25: v1(310,1680) 310,770 v1(900,180) ; v1@1560.05,180 v1(1560.05,180.05)
  Bottom Layer w50: v1(900,180) 1560.05,180 v1(2200,180) 2300,80 3800,80 3880,160 3880,1100.32 J9.1 1636.22,1240.16 J1.2 J1.4
+12V: C2.2 D7.3 J8.1 K1.1 K1.6 K2.86 K3.1 K3.6 K4.1 K4.6 U6.4 U6.5 | length 10393
  Top Layer w25: U6.5 U6.4 3275.06,1704.1 3275.39,1704.43 3275.39,1791.77 C2.2@3280.32,1796.7 ; D7.3 3860,1267.24 3860,1632.13 J8.1
  Top Layer w50: K4.1 646.85,2816.93 700,2763.78 v1(700,2750) ; K4.6 615.94,3425 v1(620,3429.05) ; v1(1520,2720) 1521.46,2721.46 K1.1 ; v1(1520,3420) 1521.46,3418.54 K1.6 ; C2.2 3284.57,1884.57 3320,1920 3572.13,1920 J8.1 ; v1(3760,3420) 3765.55,3414.45 K3.6 ; K3.1 3796.46,2816.93 3840,2773.39 v1(3840,2760)
  Bottom Layer w50: v1(620,3429.05) 620,2830 v1(700,2750) 730,2720 1200,2720 1520,2400 ; v1(1520,3420) v1(1520,2720) 1520,2400 ; K2.86 2570.79,3049.21 2640,2980 2640,2620 2560,2540 2560,2310 2670,2200 ; J8.1 3840,1851.81 3840,2640 ; v1(3760,3420) 3840,3340 v1(3840,2760) 3840,2640 ; 1520,2400 1720,2200 2670,2200 ; 2670,2200 2980,2200 3420,2640 3840,2640
GND: C2.1 C3.2 C4.1 C5.1 C6.1 C7.1 C8.1 C9.1 C10.1 D1.2 D2.2 D3.2 D4.2 D5.2 D6.2 J1.6 J1.9 J1.14 J1.20 J1.25 J1.30 J1.34 J1.39 J3.3 J8.2 J9.2 J11.4 J12.2 J13.3 J15.3 J16.1 J17.3 Q1.5 Q2.3 Q3.3 R8.2 R9.1 R13.2 R15.2 U1.2 U2.2 U3.2 U4.2 U5.2 U6.2 U8.2 U8.6 U9.2 U10.2 U11.2 U12.2 U13.2 U14.2 U15.2 | length 240.7
  Top Layer w10: C10.1 3364.53,2229.09 3376.77,2229.09 3402.09,2254.41 U13.2 ; C9.1 3364.53,2409.09 3376.13,2409.09 3401.45,2434.41 U12.2
NetC1_1: C1.1 L1.1 U6.6 | length 217
  Top Layer w25: L1.1 3169.49,1532.96 3276.58,1532.96 C1.1 3275.39,1541.63 3275.39,1628.96 3275.06,1629.3 U6.6
NetC1_2: C1.2 U6.1 | length 99.4
  Top Layer w25: C1.2 3356.12,1541.63 3356.12,1628.96 3356.45,1629.3 U6.1
NetD1_1: D1.1 J1.36 R1.1 | length 361.1
  Top Layer w25: J1.36 2740.35,658.07 2740.35,708.6 2718.48,730.47 2718.48,848.96 2753.9,884.37 D1.1 R1.1
NetD3_1: D3.1 J1.40 R2.1 | length 361.1
  Top Layer w25: J1.40 2940.35,658.07 2940.35,708.6 2918.48,730.47 2918.48,848.96 2953.9,884.37 D3.1 R2.1
NetD4_1: D4.1 J1.38 R3.2 | length 361.1
  Top Layer w25: J1.38 2840.35,658.07 2840.35,708.6 2818.48,730.47 2818.48,848.96 2853.9,884.37 D4.1 R3.2
NetD5_1: D5.1 R7.2 R9.2 U8.1 | length 572.6
  Top Layer w10: R7.2 695.91,479.65 757.01,540.75 770.39,540.75 R9.2 859.88,560.35 883.9,584.37 D5.1
  Top Layer w25: U8.1 759.8,852.86 761.18,851.48 790,822.66 R9.2
NetD6_1: D6.1 J1.31 R11.1 | length 437.2
  Top Layer w25: J1.31 2547.24,551.34 2499.23,599.35 2499.23,823.6 D6.1@2548.48,872.85 ; D6.1 R11.1
NetD7_1: D7.1 J10.1 Q2.4 | length 874.2
  Top Layer w25: Q2.4 3440,578.7 3602.6,741.3 D7.1
  Top Layer w50: Q2.4 3440,541.3 3562.99,418.31 J10.1
NetD7_2: D7.2 J10.2 Q3.4 | length 790.2
  Top Layer w25: D7.2 3760,870.16 Q3.4 Q3.4@3759.84,562.26
  Top Layer w50: J10.2 Q3.4@3759.84,562.26
NetJ1_3: J1.3 R4.1 U9.4 | length 2246.9
  Top Layer w10: U9.4 475.66,2245.24 550.07,2319.65 660.35,2319.65 684.49,2295.51 684.49,2289.61 704.09,2270 R4.1
  Top Layer w25: R4.1 779.75,2270 v1(1095.05,1954.7) ; v1(1100,1560) 1099.23,1559.23 1099.23,599.35 1147.24,551.34 J1.3
  Bottom Layer w25: v1(1095.05,1954.7) 1095.05,1564.95 v1(1100,1560)
NetJ1_5: J1.5 R6.1 U10.4 | length 2084.2
  Top Layer w10: U10.4 475.66,2065.24 540.07,2129.65 644.45,2129.65 704.09,2070 R6.1
  Top Layer w25: R6.1 779.75,2070 886.92,1962.83 1199.23,1650.52 1199.23,599.35 1247.24,551.34 J1.5
NetJ1_7: J1.7 R10.1 U11.4 | length 1874.9
  Top Layer w10: U11.4 465.98,1485.59 540.39,1560 634.45,1560 657.24,1537.2 694.09,1500.35 R10.1
  Top Layer w25: R10.1 v1@1050,1500.35 ; v1(1300,1500) 1300,700 1299.23,699.23 1299.23,599.35 1347.24,551.34 J1.7
  Bottom Layer w25: v1(1050,1500) v1(1300,1500)
NetJ1_8: J1.8 U13.4 | length 2935.9
  Top Layer w25: v1(2300,930) 2300,1150.29 3289.71,2140 3407.3,2140 3496.11,2228.82 U13.4
  Bottom Layer w25: J1.8 1626.06,930 v1(2300,930)
NetJ1_10: J1.10 U12.4 | length 3026.8
  Top Layer w25: v1(2240,880) 2240,1132.72 3240,2132.72 3240,2300 3270,2330 3416.66,2330 3495.48,2408.82 U12.4
  Bottom Layer w25: J1.10 1676.06,880 v1(2240,880)
NetJ1_11: J1.11 U14.1 | length 2869.7
  Top Layer w25: U14.1 282.6,2518.66 421.26,2380 1062.72,2380 1500,1942.72 1500,700 1499.23,699.23 1499.23,599.35 1547.24,551.34 J1.11
NetJ1_12: J1.12 U15.1 | length 2516.2
  Top Layer w25: U15.1 562.6,2518.66 671.26,2410 1075.15,2410 1550,1935.15 1550,653.94 J1.12
NetJ1_15: J1.15 U1.1 | length 2204
  Top Layer w25: U1.1 1182.6,2344.98 1700,1827.57 1700,740 1699.23,739.23 1699.23,599.35 1747.24,551.34 J1.15
NetJ1_16: J1.16 U2.1 | length 2020.5
  Top Layer w25: U2.1 1382.6,2187.4 1746.21,1823.79 1746.21,652.21 J1.16
NetJ1_18: J1.18 U3.1 | length 1631.2
  Top Layer w25: J1.18 1847.24,867.24 2382.6,1402.6 U3.1
NetJ1_19: J1.19 Q1.1 R8.1 | length 1985.6
  Top Layer w10: R8.1 490,669 590,769 Q1.1
  Top Layer w25: v1(520,770) 520.5,769.5 593.5,769.5 Q1.1
  Bottom Layer w25: v1(520,770) 890,400 1820,400 1940.35,520.35 1940.35,544.29 J1.19
NetJ1_22: J1.22 U4.1 | length 2424.6
  Top Layer w25: J1.22 2047.24,1024.82 3180,2157.57 3180,2518.03 U4.1
NetJ1_24: J1.24 U5.1 | length 2483.6
  Top Layer w25: J1.24 2147.24,1082.39 3210,2145.15 3210,2410.22 3329.78,2530 3373.94,2530 3422.6,2578.66 U5.1
NetJ1_32: J1.32 R14.2 | length 1421.8
  Top Layer w25: v1(3700,1020) 3705.55,1020 3779.65,945.91 R14.2
  Bottom Layer w25: J1.32 2596.06,700 3057.57,700 3377.57,1020 v1(3700,1020)
NetJ1_33: J1.33 R12.2 | length 933.5
  Top Layer w25: v1(3348.84,931.16) 3353.26,935.58 3415.23,935.58 R12.2
  Bottom Layer w25: J1.33 2696.06,600 3017.68,600 v1(3348.84,931.16)
NetJ2_1: J2.1 K1.4 | length 758.3
  Top Layer w50: K1.4 1616.93,3116.93 1712.6,3212.6 J2.1
NetJ2_2: J2.2 K1.3 | length 884
  Top Layer w50: J2.2 1380,3604.41 1380,3080 1443.07,3016.93 K1.3
NetJ3_2: J3.2 J13.2 J15.2 J17.2 U11.5 | length 3391
  Top Layer w25: J13.2 311.34,1435.71 448.38,1435.71 U11.5 454.2,1434.41 528.61,1360 740,1360 980,1120 J15.2@980,269.56 ; J15.2 984.25,215.75 1020,180 1500,180 1542.45,137.55 1597.55,137.55 1640,180 ; J17.2 1633.86,186.14 1640,180 ; J3.2 2280,306.57 2280,180 2260.1,180 2217.6,137.5 2179.57,137.5 2137.07,180 1640,180
NetJ4_1: J4.1 R1.2 | length 1316.6
  Top Layer w25: R1.2 2765.91,1060.35 2855.55,1150 3027.57,1150 3110,1067.57 3110,256.14 J4.1
NetJ4_2: J4.2 R11.2 | length 1656.1
  Top Layer w25: R11.2 2565.91,1040.35 2705.55,1180 3040,1180 3140,1080 3140,422.99 J4.2
NetJ5_1: J5.1 K2.30
NetJ5_2: J5.2 K2.87A
NetJ5_3: J5.3 K2.87
NetJ6_1: J6.1 K3.9 | length 792.2
  Top Layer w50: J6.1 3359.65,3733.66 3359.65,3719.65 3300,3660 3300,3180 3363.07,3116.93 K3.9
NetJ6_2: J6.2 K3.10 | length 947.3
  Top Layer w50: J6.2 3169.29,3130.71 3283.07,3016.93 K3.10@3460,3016.93
NetJ7_1: J7.1 K3.4 | length 790.5
  Top Layer w50: J7.1 3900,3600 3900,3160 3856.93,3116.93 K3.4
NetJ7_2: J7.2 K3.3 | length 848.3
  Top Layer w50: J7.2 3562.99,3736.64 3620,3679.63 3620,3092.2 3695.28,3016.93 K3.3
NetJ11_2: J11.2 U8.4 U9.5 | length 1598.4
  Top Layer w25: J11.2 359.25,2165.35 387.95,2194.06 U9.5 ; U8.4 736.28,1003.55 806.78,1003.55 813.24,1010 v1(820,1010)
  Bottom Layer w25: v2(410,2190) 470,2130 470,1360 v1(820,1010)
NetJ11_3: J11.3 U8.5 U10.5 | length 1331.8
  Top Layer w25: J11.3 359.25,2086.61 425.92,2019.94 453.47,2019.94 U10.5 ; v1(460,1000) 462.17,1002.17 549.86,1002.17 U8.5
  Bottom Layer w25: v2(410,2040) 410,1050 v1(460,1000)
NetJ12_1: J12.1 Q1.2 R5.1 | length 711.1
  Top Layer w10: R5.1 584.09,479.65 540,523.74 540,680 590,730 Q1.2
  Top Layer w25: J12.1 565.96,467.54 577.89,467.54 R5.1
NetJ14_1: J14.1 U8.7 | length 377.1
  Top Layer w25: J14.1 253.25,902.86 U8.7
NetJ14_2: J14.2 U8.8 | length 437.9
  Top Layer w25: J14.2 204.12,656.88 235.14,656.88 431.13,852.86 U8.8
NetJ16_2: J16.2 U13.5 | length 174.6
  Top Layer w25: U13.5@3506.76,2285.89 3506.76,2310.89 3570.57,2374.7 3619.78,2374.7 J16.2
NetJ16_3: J16.3 U12.5 | length 127.2
  Top Layer w25: U12.5 3500.31,2460.31 3626.65,2460.31 J16.3
NetJ18_1: J18.1 R2.2 | length 1057.6
  Top Layer w25: J18.1 2916.66,337.92 2917.92,337.92 3050,470 3050,1042.72 3032.37,1060.35 R2.2
NetJ18_2: J18.2 R3.1 | length 1177
  Top Layer w25: R3.1 2865.91,1060.35 2925.55,1120 3015.15,1120 3080,1055.15 3080,300 2976.85,196.85 J18.2
NetJ19_1: J19.1 K4.9 | length 783.6
  Top Layer w50: K4.9 298.03,3116.93 160,3254.96 160,3565.51 251.32,3656.83 J19.1
NetJ19_2: J19.2 K4.10 | length 901.5
  Top Layer w50: J19.2 40,3642.36 40,3274.96 298.03,3016.93 K4.10
NetJ20_1: J20.1 K4.4 | length 730.7
  Top Layer w50: K4.4 646.85,3116.93 780,3250.08 780,3688.5 J20.1
NetJ20_2: J20.2 K4.3 | length 843.6
  Top Layer w50: J20.2 480,3688.66 480,3080 543.07,3016.93 K4.3
NetJ21_1: J21.1 K1.9 | length 879.7
  Top Layer w50: K1.9 1103.07,3116.93 1060,3160 1060,3481.26 J21.1
NetJ21_2: J21.2 K1.10 | length 1044.4
  Top Layer w50: J21.2 940,3558.11 940,3100 1023.07,3016.93 K1.10
NetK1_7: K1.7 U2.3 | length 1000.5
  Top Layer w25: U2.3 v2(1420,2660)
  Top Layer w50: K1.7 1240,3322.48 v1(1240,3420)
  Bottom Layer w25: v1(1240,3420) 1240,2840 v2(1420,2660)
NetK1_12: K1.12 U1.3 | length 227
  Top Layer w25: U1.3@1220.47,2598.43 1220.47,2807.58 1229.82,2816.93 K1.12
NetK2_85: K2.85 U3.3 | length 247.8
  Top Layer w25: K2.85 2416.75,2379.07 2416.75,2142.62 U3.3
NetK3_7: K3.7 U5.3 | length 872.6
  Top Layer w25: U5.3 v1(3460,2720)
  Top Layer w50: K3.7 3478.54,3418.54 v1(3480,3420)
  Bottom Layer w25: v1(3460,2720) 3460,2726.76 3480,2746.76 v1(3480,3420)
NetK3_12: K3.12 U4.3 | length 263.5
  Top Layer w25: U4.3@3280,2660 3284.41,2660 3441.34,2816.93 K3.12
NetK4_7: K4.7 U15.3 | length 1053.9
  Top Layer w25: U15.3 v2(600,2660)
  Top Layer w50: K4.7 v1(328.94,3428.94)
  Bottom Layer w25: v1(328.94,3428.94) 328.94,2931.06 v2(600,2660)
NetK4_12: K4.12 U14.3 | length 221.3
  Top Layer w25: U14.3 320,2807.99 K4.12
NetQ1_3: Q1.3 Q1.6 R5.2 | length 256.6
  Top Layer w10: R5.2 590,687 Q1.3 598,691 671,764 681,764 Q1.6
NetQ1_4: Q1.4 R7.1 | length 132.3
  Top Layer w10: Q1.4 690,687 R7.1
NetQ2_1: Q2.1 R12.1 R13.1 | length 240.7
  Top Layer w25: R13.1 R12.1 3500.35,934.09 3512.46,921.99 3513.35,921.99 3529.76,905.57 Q2.1
NetQ3_1: Q3.1 R14.1 R15.1 | length 230.1
  Top Layer w25: Q3.1 3855.06,819.68 3855.06,934.7 R14.1 3860.53,940.18 3860.53,1039.82 R15.1
pads on no net: J1.13 J1.21 J1.23 J1.26 J1.27 J1.28 J1.29 J1.35 J1.37 J3.MP1 J3.MP2 J11.MP1 J11.MP2 J13.MP1 J13.MP2 J15.MP1 J15.MP2 J16.4 J16.MP1 J16.MP2 J17.MP1 J17.MP2 K1.5 K1.8 K2. K3.5 K3.8 K4.5 K4.8 MH1.15 MH2.15 MH3.15 MH4.15 MH5.15 MH6.15 U9.3 U10.3 U11.3 U12.3 U13.3

## Polygon pours and split planes (outlines as drawn)
GND on Bottom Layer "GND_L02_P010" (solid, remove dead copper, pour order 10): 0,2834.65 0,0 3937.01,0 3937.01,2834.65 3188.98,2834.65 3188.98,2480.32 1692.91,2480.32 1692.91,2834.65
NetJ5_1 on Bottom Layer "NETJ5_1_L02_P006" (solid, remove dead copper, pour order 6): 2677.17,2795.28 2677.17,3307.09 2578.74,3405.51 2578.74,3937.01 3031.5,3937.01 3031.5,2795.28
NetJ5_3 on Bottom Layer "NETJ5_3_L02_P004" (solid, remove dead copper, pour order 4): 1850.39,2795.28 1850.39,3937.01 2283.46,3937.01 2283.46,3408.16 2145.67,3270.37 2145.67,2795.28
NetJ5_2 on Bottom Layer "NETJ5_2_L02_P005" (solid, remove dead copper, pour order 5): 2224.41,2795.28 2224.41,3248.03 2362.2,3385.83 2362.2,3937.01 2500,3937.01 2500,3385.83 2598.43,3287.4 2598.43,2795.28
GND on Top Layer "GND_L01_P012" (solid, remove dead copper, pour order 12): 0,2831.06 0,-3.58 3937.01,-3.58 3937.01,2831.06 3188.98,2831.06 3188.98,2476.73 1692.91,2476.73 1692.91,2831.06
NetJ5_1 on Top Layer "NETJ5_1_L01_P009" (solid, remove dead copper, pour order 9): 2677.17,2637.8 2677.17,3307.09 2578.74,3405.51 2578.74,3937.01 3031.5,3937.01 3031.5,2637.8
NetJ5_3 on Top Layer "NETJ5_3_L01_P007" (solid, remove dead copper, pour order 7): 1850.39,2637.8 1850.39,3937.01 2283.46,3937.01 2283.46,3408.16 2145.67,3270.37 2145.67,2637.8
NetJ5_2 on Top Layer "NETJ5_2_L01_P008" (solid, remove dead copper, pour order 8): 2224.41,2637.8 2224.41,3248.03 2362.2,3385.83 2362.2,3937.01 2500,3937.01 2500,3385.83 2598.43,3287.4 2598.43,2637.8

## Other copper
Bottom Layer:
  text "Siegfried's Brain v0.1 / Enrico Cirignaco / February 2022" at 2913.39,1564.96 h60

## Silkscreen, mask and mechanical layers (free items; w line width, h text height)
Mechanical 1:
  the board outline again, w10
Top Overlay 2:
  lines w20: 11.81,2834.65 1692.91,2834.65 1692.91,2480.32 3188.98,2480.32 3188.98,2834.65 3925.2,2834.65 ; 11.81,2992.13 1751.97,2992.13 1751.97,3925.2 ; 1850.39,3925.2 1850.39,2637.8 3031.5,2637.8 3031.5,3925.2 ; 3129.92,3925.2 3129.92,2992.13 3925.2,2992.13
  text "2.5mm" at 1820.71,3297.4 h40 r90
  text "2.5mm" at 3100.24,3297.4 h40 r90
  text "4mm" at 836.77,2884.02 h60
  text "4mm" at 3159.61,2884.02 h60
  text "4mm" at 1801.02,2726.54 h60 r90
  text "4mm" at 3139.61,2608.43 h60 r90